# EAGLE board CouplerDC_R12_Teflon (EAGLE 9.3.0)
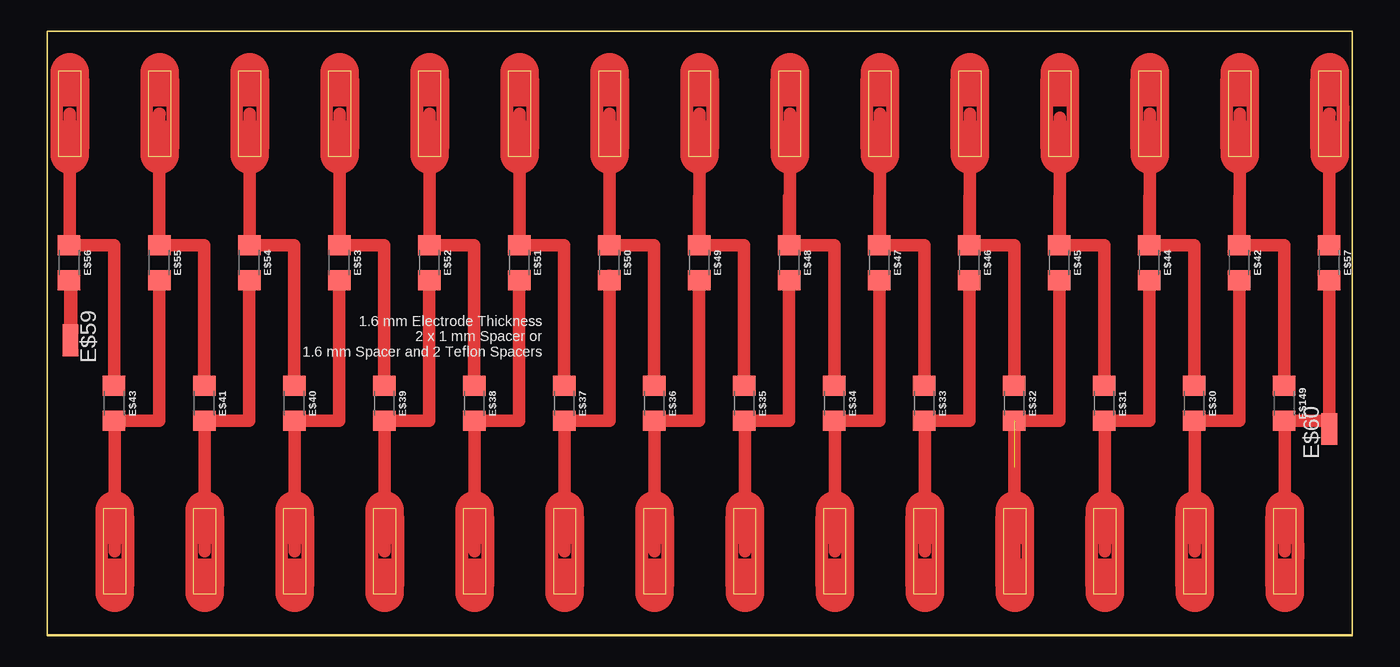
[diagram p0: board, top side]

Size 104.4 x 48.34 mm. Coordinates in mm from the lower left corner, seen from the top.
Outline: 0,48.34 0,0
Outline: 0,48.34 0,0
Outline: 0,0 104.4,0
Outline: 104.4,0 104.4,48.34 0,48.34
Outline: 0,0 104.4,0
Outline: 0,0 104.4,0
Outline: 0,0 104.4,0
Copper layers (1*16): Top 0.035mm / dielectric 1.5mm / Bottom 0.035mm
Design rules "default": minimum track width 10mil, minimum drill 24mil, track to track 8mil, track to pad 8mil, pad to pad 8mil, via to via 8mil, smd to smd 8mil, copper to edge 40mil, drill to drill 8mil, minimum pad ring 10mil, minimum via ring 8mil, stop-mask expansion 4mil, vias tented up to drill 0mil, thermal gap 10mil
Milling: 4 lines

## Footprints (pad centres in the part's own frame; a part is rotated, then mirrored left to right if it is on the bottom)
1206 = smd 1.6 x 1.8: 1 -1.4,0; 2 1.4,0
SMD1,27-2,54 = smd 1.27 x 2.54: 1 0,0

## Placement (x,y rotation side)
E$1  [GAAEXTENSIONS_SLOT3]  1.81,41.75 90 top
E$2  [GAAEXTENSIONS_SLOT3]  9.01,41.75 90 top
E$3  [GAAEXTENSIONS_SLOT3]  16.21,41.75 90 top
E$4  [GAAEXTENSIONS_SLOT3]  23.41,41.75 90 top
E$5  [GAAEXTENSIONS_SLOT3]  30.61,41.75 90 top
E$6  [GAAEXTENSIONS_SLOT3]  37.81,41.75 90 top
E$7  [GAAEXTENSIONS_SLOT3]  45.01,41.75 90 top
E$8  [GAAEXTENSIONS_SLOT3]  52.21,41.75 90 top
E$9  [GAAEXTENSIONS_SLOT3]  59.41,41.75 90 top
E$10  [GAAEXTENSIONS_SLOT3]  66.61,41.75 90 top
E$11  [GAAEXTENSIONS_SLOT3]  73.81,41.75 90 top
E$12  [GAAEXTENSIONS_SLOT3]  81.01,41.75 90 top
E$13  [GAAEXTENSIONS_SLOT3]  88.21,41.75 90 top
E$14  [GAAEXTENSIONS_SLOT3]  95.41,41.75 90 top
E$15  [GAAEXTENSIONS_SLOT3]  102.61,41.75 90 top
E$16  [GAAEXTENSIONS_SLOT3]  5.41,6.75 90 top
E$17  [GAAEXTENSIONS_SLOT3]  12.61,6.75 90 top
E$18  [GAAEXTENSIONS_SLOT3]  19.81,6.75 90 top
E$19  [GAAEXTENSIONS_SLOT3]  27.01,6.75 90 top
E$20  [GAAEXTENSIONS_SLOT3]  34.21,6.75 90 top
E$21  [GAAEXTENSIONS_SLOT3]  41.41,6.75 90 top
E$22  [GAAEXTENSIONS_SLOT3]  48.61,6.75 90 top
E$23  [GAAEXTENSIONS_SLOT3]  55.81,6.75 90 top
E$24  [GAAEXTENSIONS_SLOT3]  63.01,6.75 90 top
E$25  [GAAEXTENSIONS_SLOT3]  70.21,6.75 90 top
E$26  [GAAEXTENSIONS_SLOT3]  77.41,6.75 90 top
E$27  [GAAEXTENSIONS_SLOT3]  70.21,6.75 90 top
E$28  [GAAEXTENSIONS_SLOT3]  84.61,6.75 90 top
E$29  [GAAEXTENSIONS_SLOT3]  91.81,6.75 90 top
E$30  [1206]  91.77,18.58 270 top
E$31  [1206]  84.57,18.58 270 top
E$32  [1206]  77.37,18.58 270 top
E$33  [1206]  70.17,18.58 270 top
E$34  [1206]  62.97,18.58 270 top
E$35  [1206]  55.77,18.58 270 top
E$36  [1206]  48.57,18.58 270 top
E$37  [1206]  41.37,18.58 270 top
E$38  [1206]  34.17,18.58 270 top
E$39  [1206]  26.97,18.58 270 top
E$40  [1206]  19.77,18.58 270 top
E$41  [1206]  12.57,18.58 270 top
E$42  [1206]  95.37,29.84 270 top
E$43  [1206]  5.37,18.58 270 top
E$44  [1206]  88.17,29.84 270 top
E$45  [1206]  80.97,29.84 270 top
E$46  [1206]  73.77,29.84 270 top
E$47  [1206]  66.57,29.84 270 top
E$48  [1206]  59.37,29.84 270 top
E$49  [1206]  52.17,29.84 270 top
E$50  [1206]  44.97,29.84 270 top
E$51  [1206]  37.77,29.84 270 top
E$52  [1206]  30.57,29.84 270 top
E$53  [1206]  23.37,29.84 270 top
E$54  [1206]  16.17,29.84 270 top
E$55  [1206]  8.97,29.84 270 top
E$56  [1206]  1.77,29.84 270 top
E$57  [1206]  102.57,29.84 270 top
E$58  [GAAEXTENSIONS_SLOT3]  99.01,6.75 90 top
E$59  [SMD1,27-2,54]  1.87,23.63 180 top
E$60  [SMD1,27-2,54]  102.57,16.53 0 top
E$149  [1206]  98.97,18.58 270 top

## Library data of the parts
E$1-E$29 E$58 = CouplerDC_v2
E$30-E$57 E$149 = SparkFun-Resistors
E$59 E$60 = wirepad

## Nets
S$1: E$43.1 E$56.1
S$11: E$57.2 E$149.2
S$12: E$36.1 E$50.1
S$14: E$41.1 E$55.1
S$15: E$40.1 E$54.1
S$16: E$39.1 E$53.1
S$17: E$38.1 E$52.1
S$18: E$41.2 E$54.2
S$19: E$39.2 E$52.2
S$20: E$40.2 E$53.2
S$21: E$43.2 E$55.2
S$22: E$38.2 E$51.2
S$23: E$37.2 E$50.2
S$36: E$36.2 E$49.2
S$38: E$35.2 E$48.2
S$39: E$34.2 E$47.2
S$40: E$33.2 E$46.2
S$41: E$32.2 E$45.2
S$42: E$31.2 E$44.2
S$43: E$30.2 E$42.2
S$44: E$57.1
S$45: E$42.1 E$149.1
S$46: E$30.1 E$44.1
S$47: E$31.1 E$45.1
S$48: E$32.1 E$46.1
S$49: E$33.1 E$47.1
S$50: E$34.1 E$48.1
S$52: E$35.1 E$49.1
S$53: E$37.1 E$51.1

## Tracks (layer width: path | path; a pad name or v marks a point on that pad's centre or on a via)
S$1
  Top 1.016: 1.8,41.74 1.8,31.27 E$56.1 5.37,31.24 E$43.1
S$10
  Top 1.016: 1.54,28.41 1.87,28.41
  Top 1.06: 1.87,28.41 1.87,23.63
S$11
  Top 1.016: 99.01,6.75 99.01,17.18 E$149.2 102.57,17.18 E$57.2
S$12
  Top 1.016: E$36.1 48.57,31.24 E$50.1 45.01,31.24 45.01,41.74
S$14
  Top 1.016: 9.01,41.74 8.97,41.74 E$55.1 12.57,31.24 E$41.1
S$15
  Top 1.016: 16.21,41.74 16.21,31.24 E$54.1 19.77,31.24 E$40.1
S$16
  Top 1.016: 23.41,41.74 23.41,31.24 E$53.1 26.97,31.24 E$39.1
S$17
  Top 1.016: 30.61,41.74 30.61,31.24 E$52.1 34.17,31.24 E$38.1
S$18
  Top 1.016: E$54.2 16.17,17.18 E$41.2 12.61,17.18 12.61,6.75
S$19
  Top 1.016: E$52.2 30.57,17.18 E$39.2 27.01,17.18 27.01,6.75
S$20
  Top 1.016: E$53.2 23.37,17.18 E$40.2 19.81,17.18 19.81,6.75
S$21
  Top 1.016: E$55.2 8.97,17.18 E$43.2 5.4,17.18 5.4,7.2 5.41,7.2 5.41,6.75
S$22
  Top 1.016: E$51.2 37.77,17.18 E$38.2 34.21,17.18 34.21,6.75
S$23
  Top 1.016: E$50.2 44.97,28.8 45,28.8 45,17.18 E$37.2 41.41,17.18 41.41,6.75
S$36
  Top 1.016: E$49.2 52.17,17.18 E$36.2 48.61,17.18 48.61,6.75
S$38
  Top 1.016: E$48.2 59.37,17.18 E$35.2 55.81,17.18 55.81,6.75
S$39
  Top 1.016: E$47.2 66.57,17.18 E$34.2 63.01,17.18 63.01,6.75
S$40
  Top 1.016: E$46.2 73.77,17.18 E$33.2 70.21,17.18 70.21,6.75
S$41  (1 unrouted)
  Top 1.016: E$45.2 80.97,17.18 E$32.2 77.4,17.18 77.4,5.4
S$42
  Top 1.016: E$44.2 88.17,17.18 E$31.2 84.61,17.18 84.61,6.75
S$43
  Top 1.016: E$42.2 95.37,17.18 E$30.2 91.81,17.18 91.81,6.75
S$44
  Top 1.016: 102.61,41.74 102.57,41.74 E$57.1 | E$57.1 102.57,31.39 | E$57.1 102.57,35.08
S$45
  Top 1.016: 95.41,41.74 95.41,31.24 E$42.1 | E$42.1 95.37,35.08 | E$42.1 98.97,31.24 E$149.1
S$46
  Top 1.016: 88.21,41.74 88.21,31.24 E$44.1 | E$44.1 88.17,35.08 | E$44.1 91.77,31.24 E$30.1
S$47
  Top 1.016: 81,41.4 81,31.24 E$45.1 | E$45.1 80.97,35.08 | E$45.1 84.57,31.24 E$31.1
S$48
  Top 1.016: 73.81,41.74 73.81,31.24 E$46.1 | E$46.1 73.77,35.08 | E$46.1 77.37,31.24 E$32.1
S$49
  Top 1.016: 66.61,41.74 66.61,31.24 E$47.1 | E$47.1 66.57,35.08 | E$47.1 70.17,31.24 E$33.1
S$50
  Top 1.016: 59.41,41.74 59.41,31.24 E$48.1 | E$48.1 59.37,35.08 | E$48.1 63,31.24 63,21.14 62.97,21.14 E$34.1
S$52
  Top 1.016: 52.21,41.74 52.21,31.24 E$49.1 | E$49.1 52.17,35.08 | E$49.1 55.77,31.24 E$35.1
S$53
  Top 1.016: 37.81,41.74 37.81,41.4 37.8,41.4 37.8,31.24 E$51.1 41.37,31.24 E$37.1

## Text on the board
tPlace: 1.6 mm Electrode Thickness / 2 x 1 mm Spacer or / 1.6 mm Spacer and 2 Teflon Spacers